# Altium PCB PCB2.PcbDoc
Units mm, origin at the board's own origin, x right, y up, seen from the top; angles counter-clockwise.
Board outline 80 x 80 mm, 4 copper layers (Top Layer, Internal Plane 1, Internal Plane 2, Bottom Layer); 5 components, 22 nets, 70 pads, 0 vias.
Unrouted connection lines stored in the file: 7.
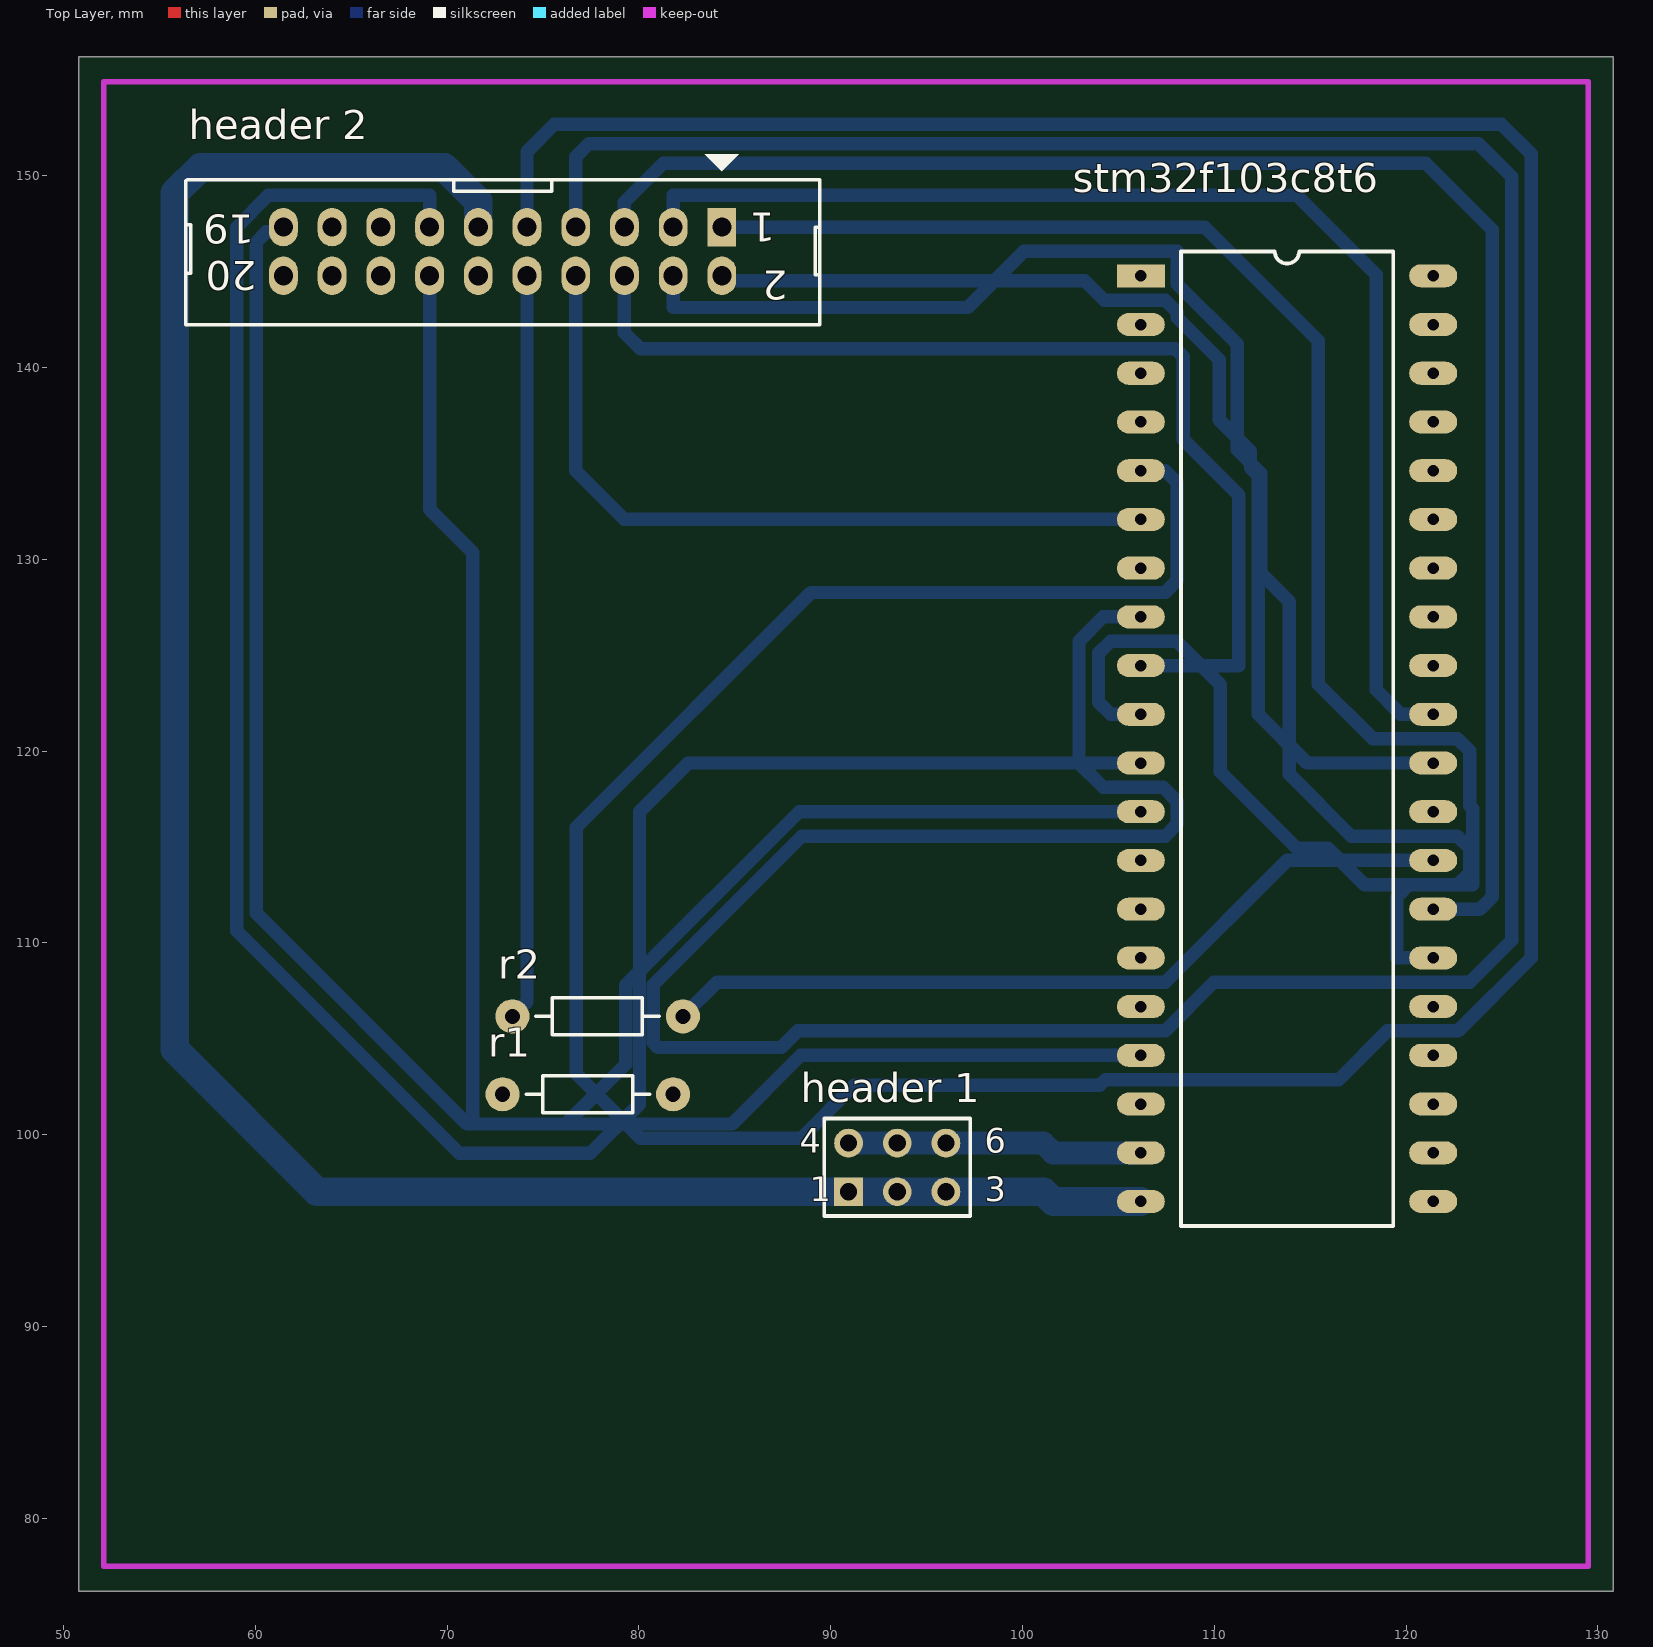
[diagram p0: Top Layer view]
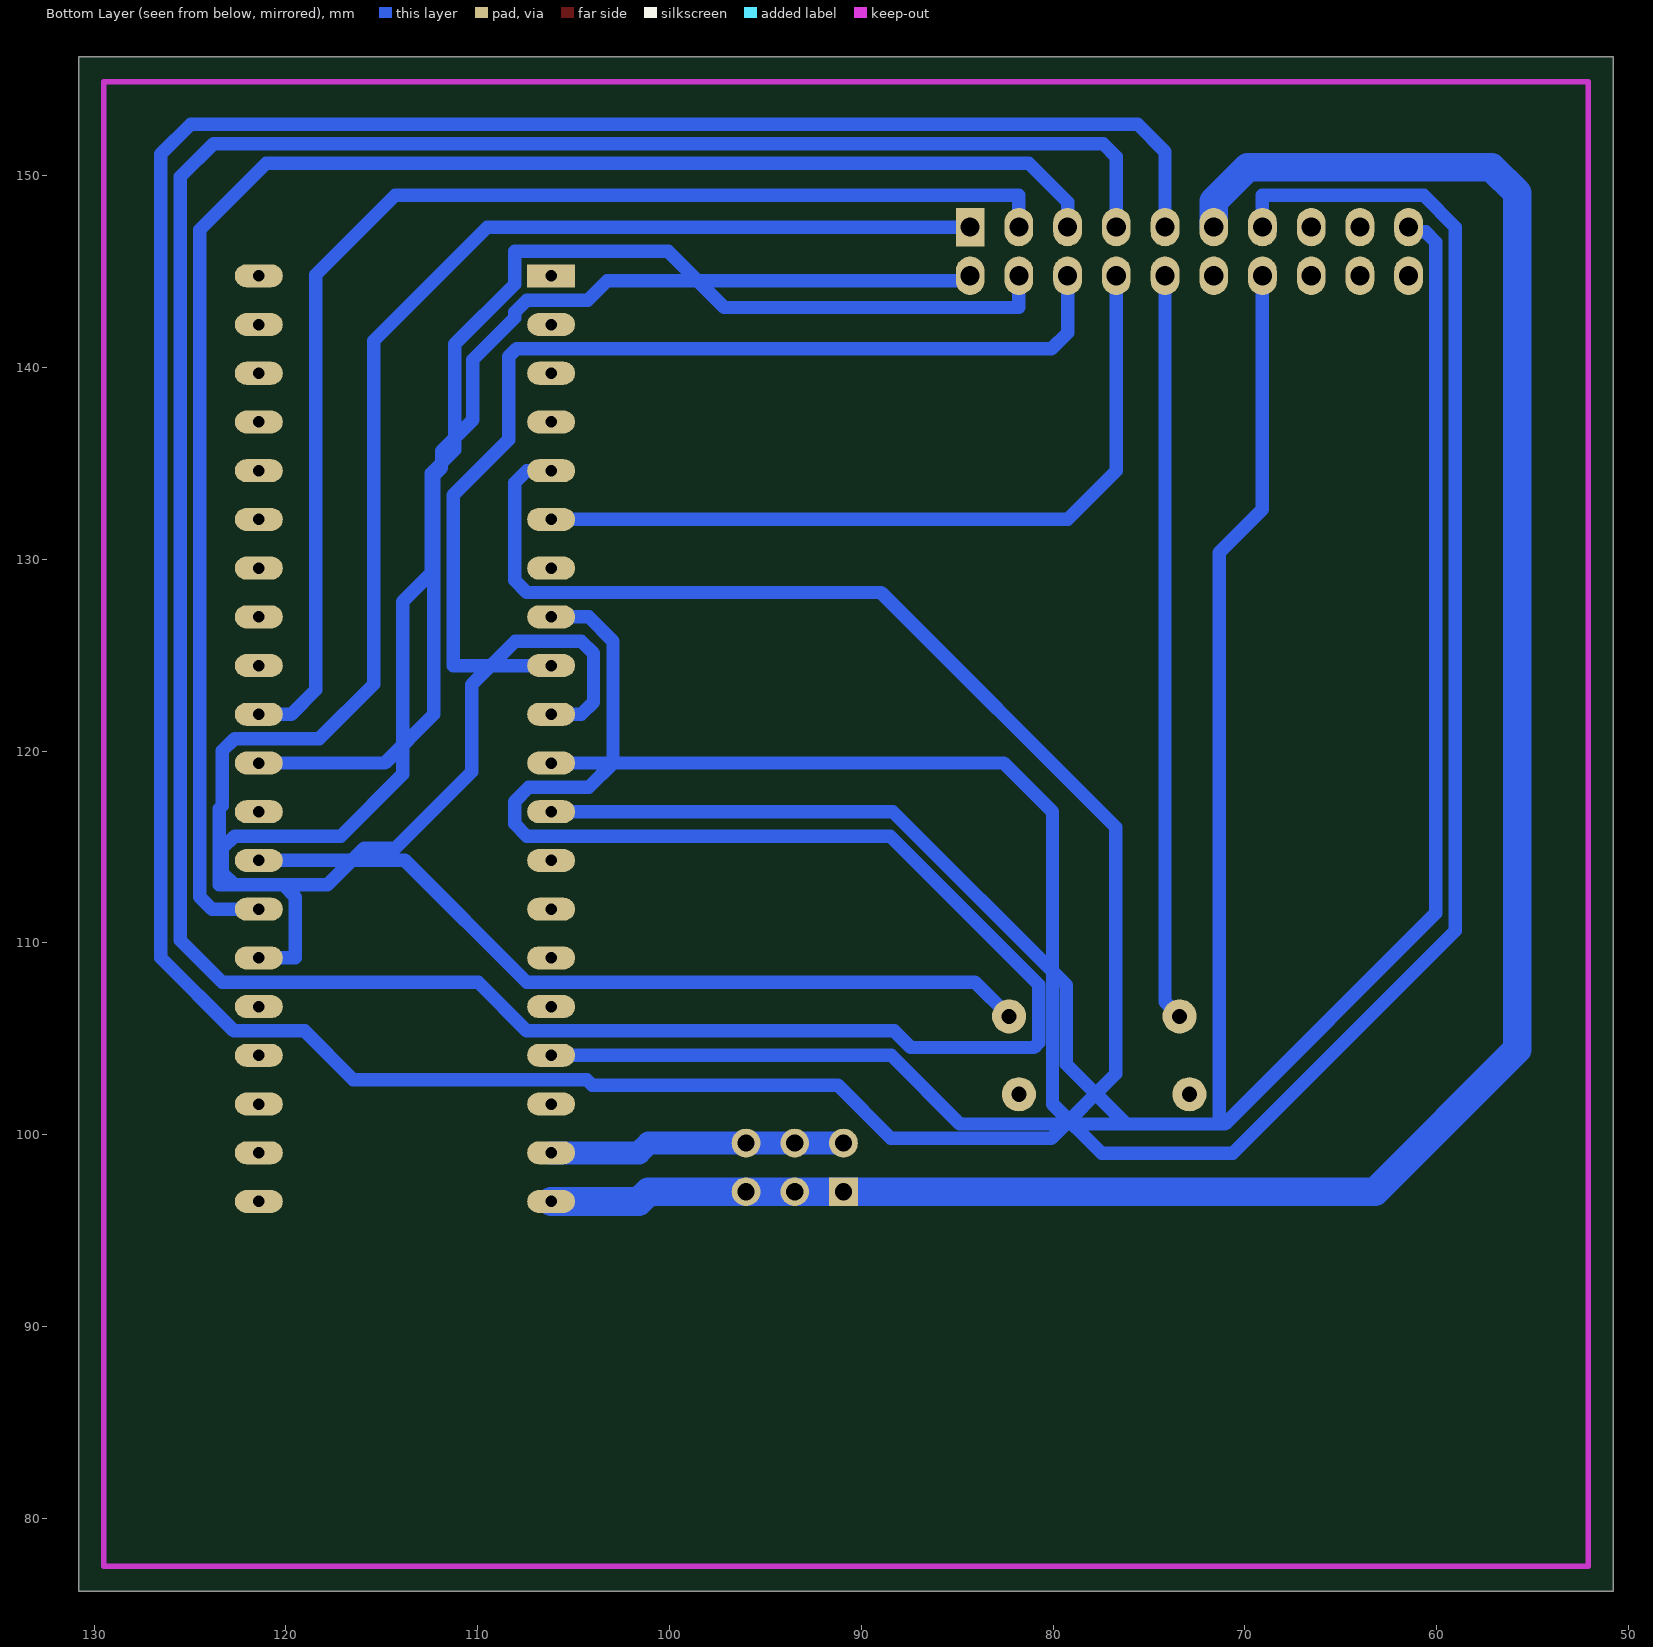
[diagram p1: Bottom Layer view, seen from below]
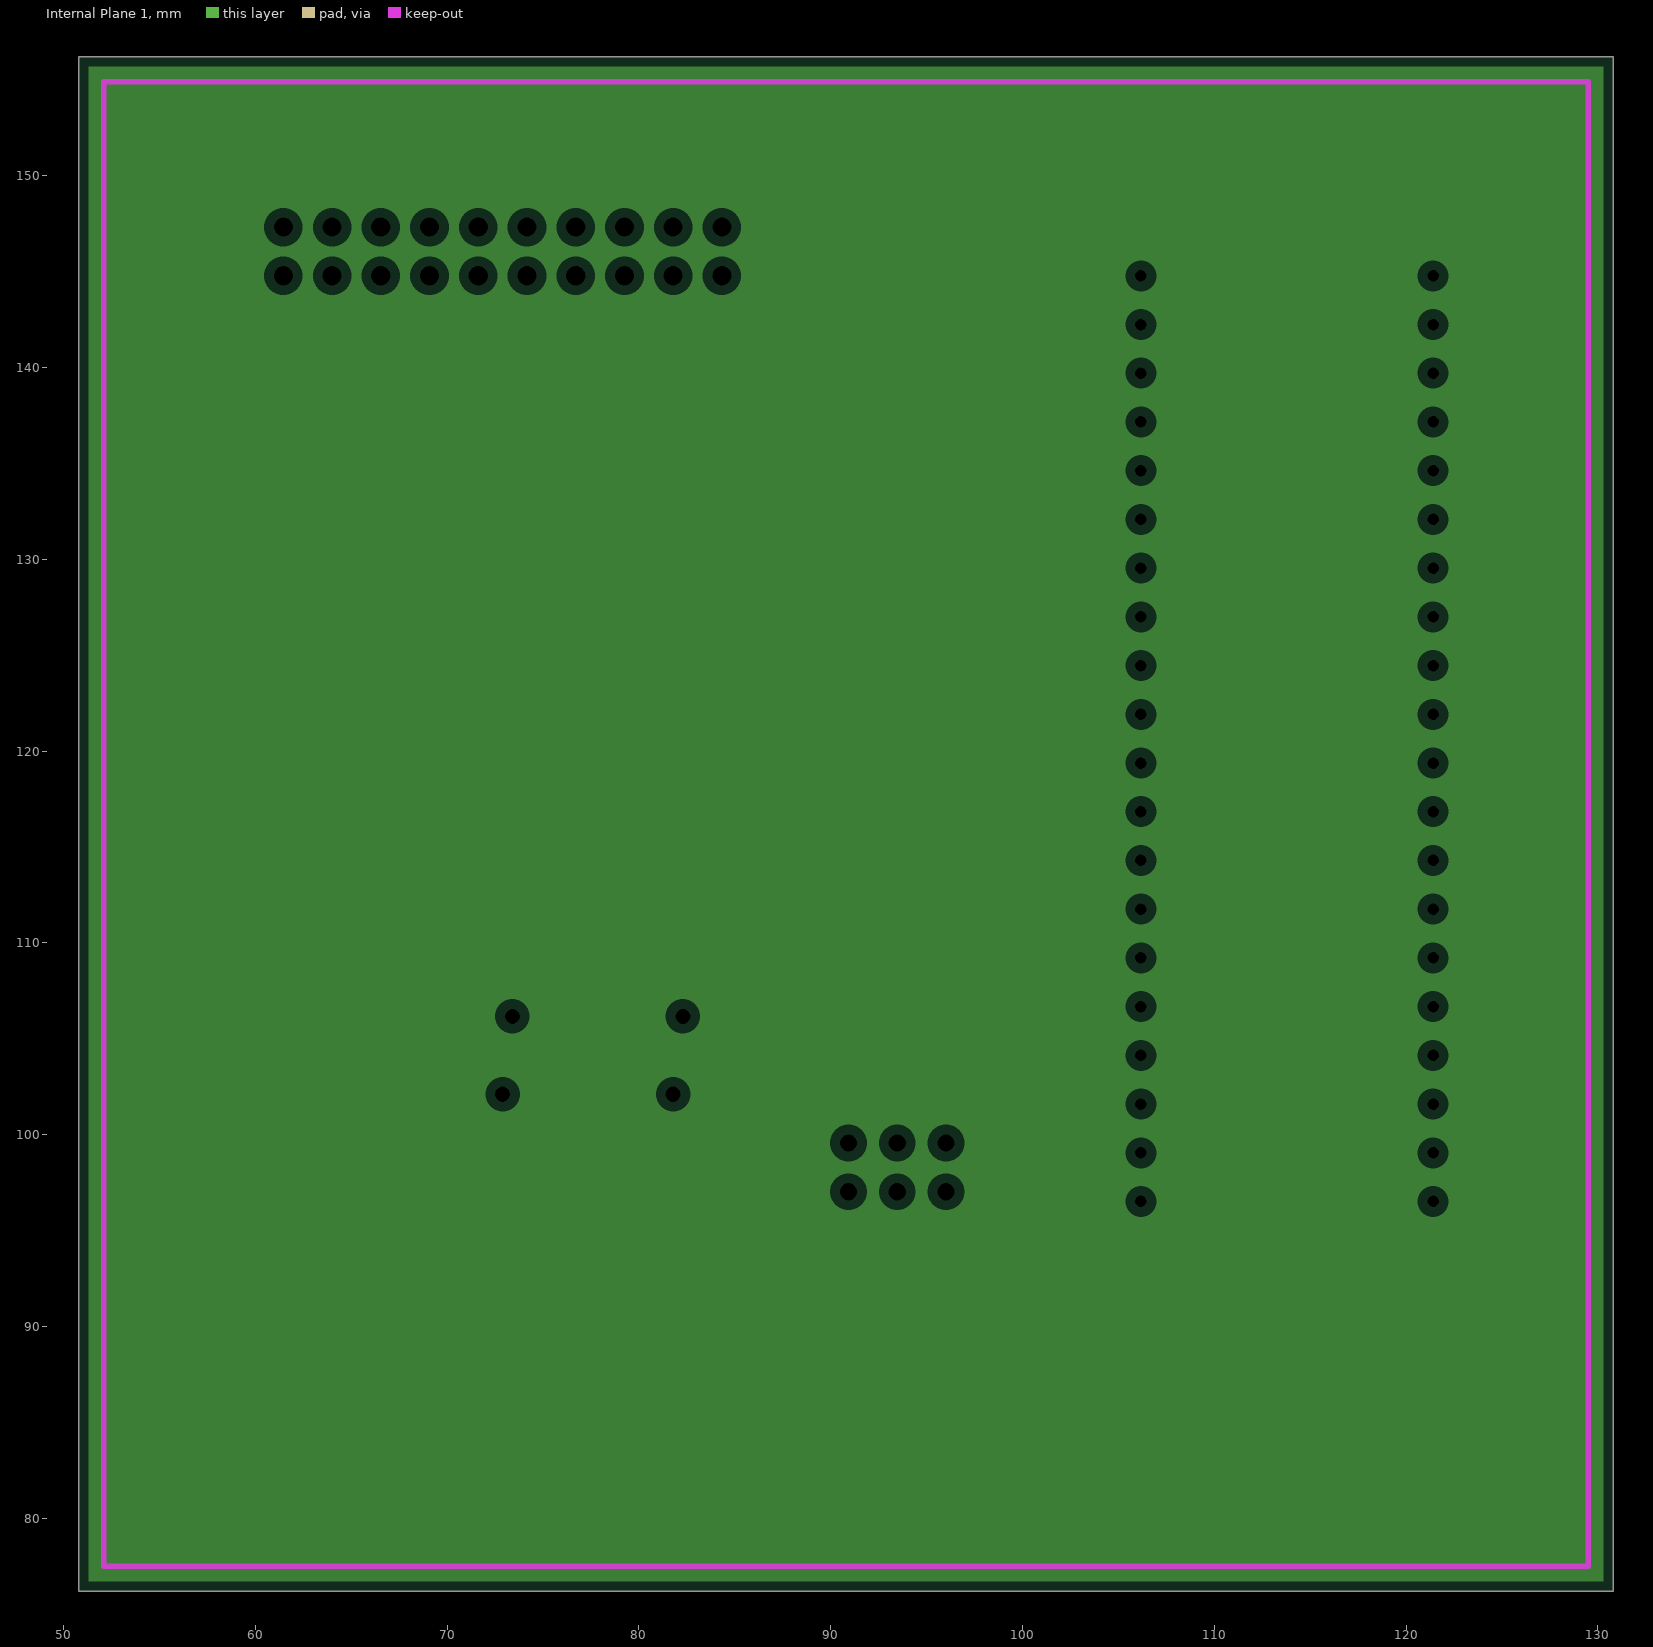
[diagram p2: Internal Plane 1, clearances drawn from the general rule]
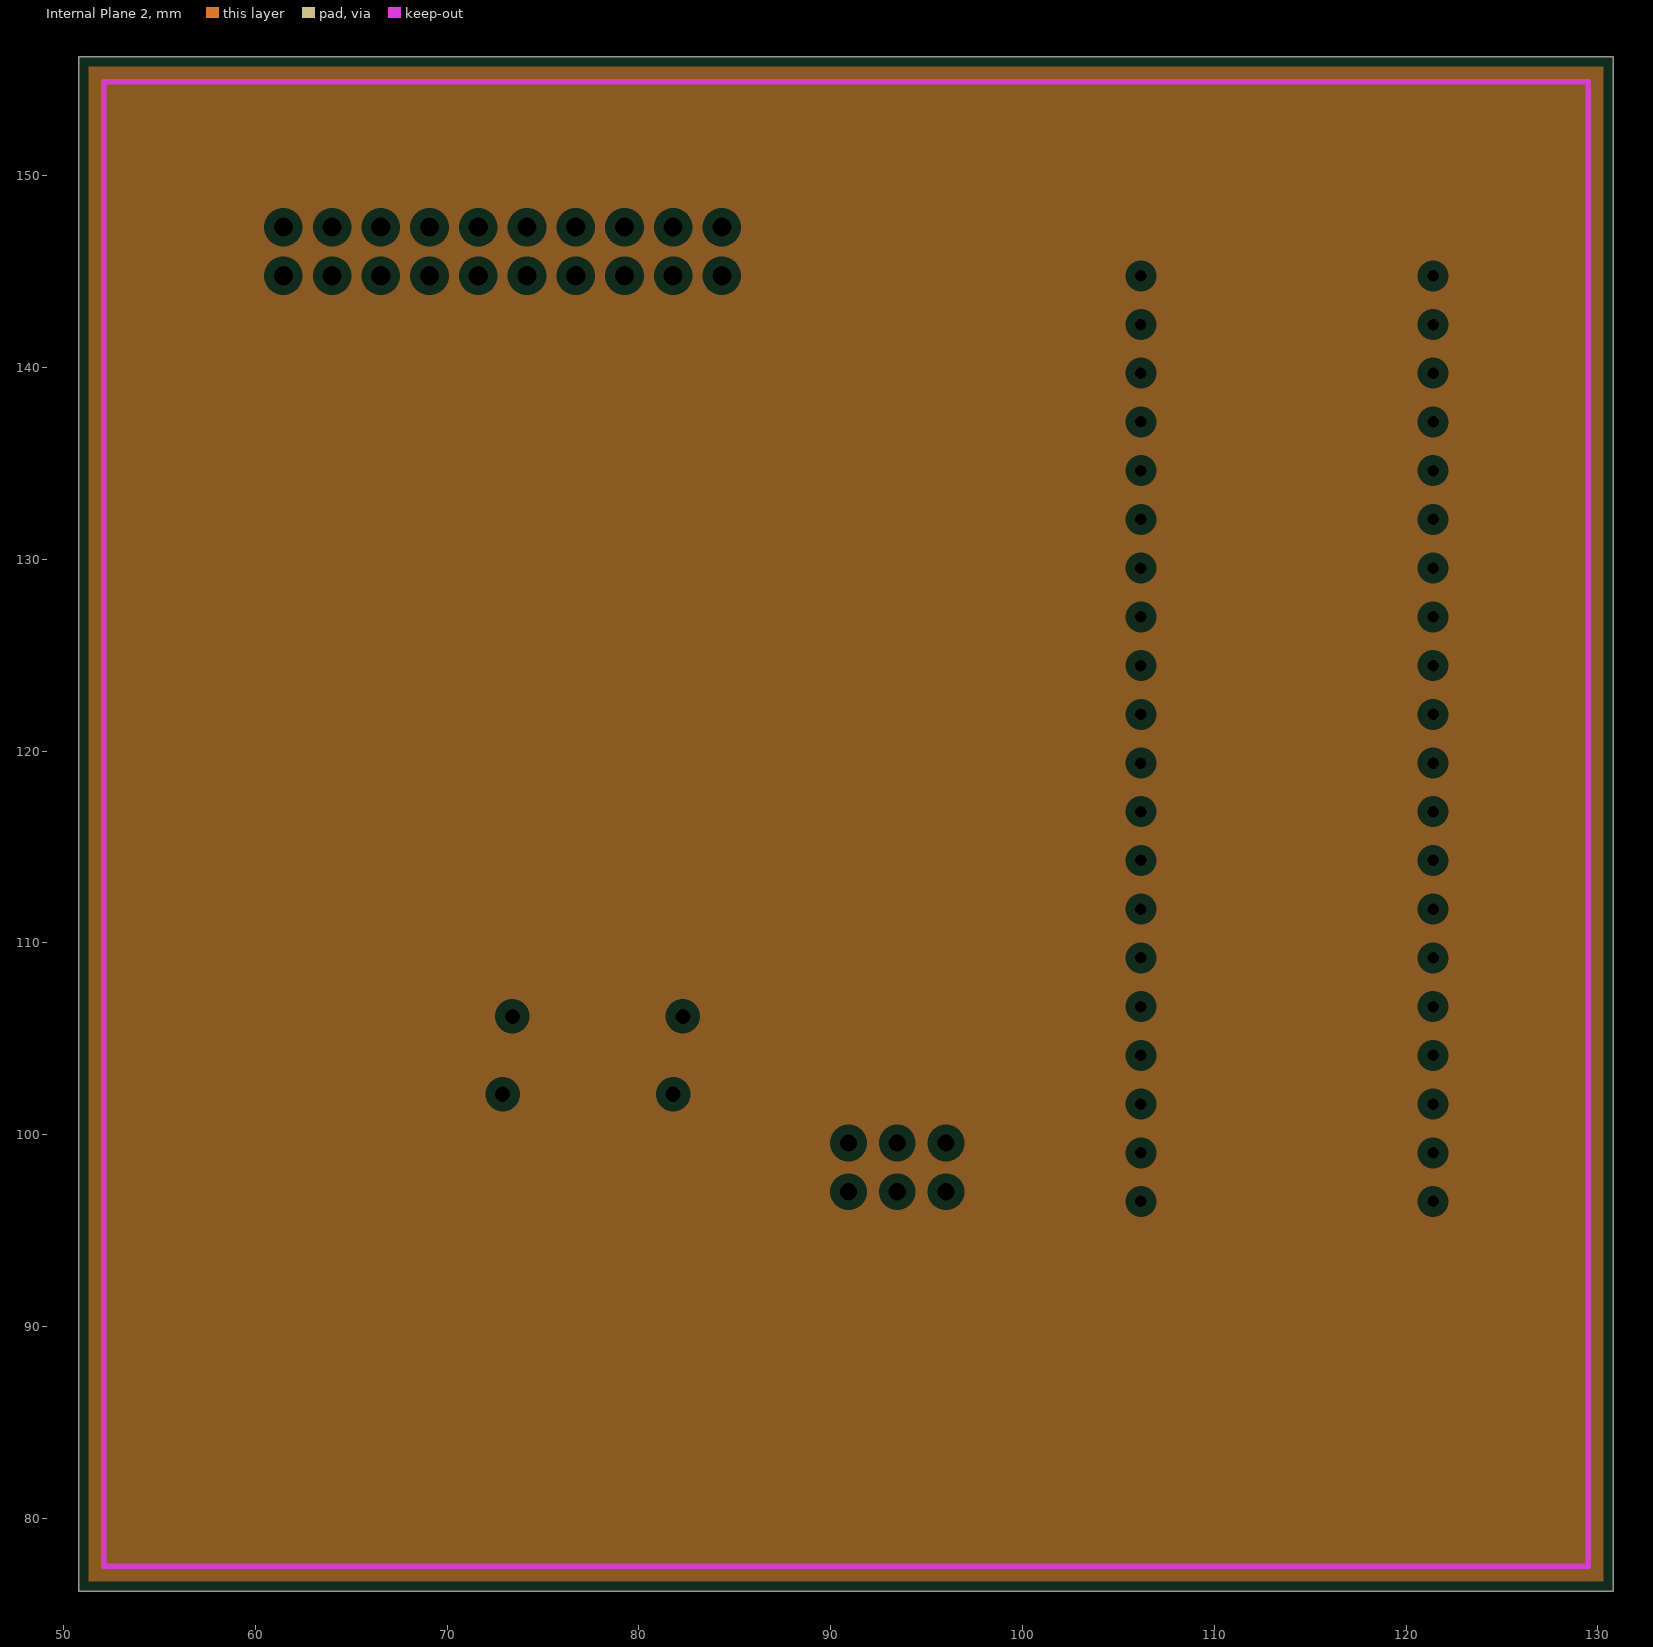
[diagram p3: Internal Plane 2, clearances drawn from the general rule]

## Layer stack, top to bottom
Top Layer: signal copper 0.0356
Dielectric: dielectric 0.32, FR-4, Dk 4.8
Internal Plane 1: plane copper 0.0356
Dielectric: dielectric 0.32, FR-4, Dk 4.8
Internal Plane 2: plane copper 0.0356
Dielectric: dielectric 0.32, FR-4, Dk 4.8
Bottom Layer: signal copper 0.0356

## Board outline
50.8,76.2 130.8,76.2 130.8,156.2 50.8,156.2

## Design rules (kind name [scope] priority, off if disabled: settings)
Clearance [All] p1: gap=0.3
PlaneClearance [All] p1: clearance=0.508
PlaneConnect [All] p1: planeconnectstyle=Relief reliefexpansion=0.508 reliefentries=4 reliefconductorwidth=0.254 reliefairgap=0.254
PolygonConnect [All] p1: connectstyle=Relief reliefconductorwidth=0.254 reliefentries=4 polygonreliefangle="90 Angle"
RoutingLayers [All] p1: top layer_v5=FALSE bottom layer_v5=TRUE
RoutingVias [All] p1: holewidth=0.6 width=1 viastyle="Through Hole" minholewidth=0.711 minwidth=1.27 maxholewidth=0.711 maxwidth=1.27
SilkscreenOverComponentPads [All] p1: minsilkscreentomaskgap=0.254
SolderMaskExpansion [All] p1: expansion=0.102
Width GND [InNet('GND')] p1: maxlimit=1.2 minlimit=1.2 preferedwidth=1.2
Width VCC [InNet('VCC')] p2: maxlimit=1.5 minlimit=1.5 preferedwidth=1.5
Width NET [All] p3: maxlimit=0.7 minlimit=0.7 preferedwidth=0.7
24 further rules are at their usual default settings.

## Components (designator, comment, footprint, x,y, rotation, side; value= is the part's Value field where it differs from the comment)
"header 1" "Header 3X2A" HDR2X3_CEN 90.932,97.028 r0 top
"header 2" "Header 10x2" Hed2X10 84.328,147.32 r180 top
r1 "1k" R1/4W 81.788,102.108 r180 top
r2 "1k" R1/4W 82.296,106.172 r180 top
stm32f103c8t6 "KIT STM32F103C8T6" "STM32F103 KIT" 106.172,144.78 r0 top

## Footprints (in the part's own frame and the unit in brackets; to place one, negate y for a bottom-side part, rotate by r counter-clockwise, add the part's x,y. Pads: shape width x height; smd on the part's side, far side on the other; paste and mask are expansions set on the pad)
HDR2X3_CEN [mm] "Connector; Header; 3x2 Position"
  rect 1.5x1.5 hole 0.9: 1(0,0)
  round 1.5 hole 0.9: 2(2.54,0) 3(5.08,0) 4(0,2.54) 5(2.54,2.54) 6(5.08,2.54)
  silkscreen extent -1.27,-1.27 6.35,3.81, body extent -1.27,-1.27 6.35,3.81, height 7
Hed2X10 [mm] "Header 10x2,20 pin, connecter"
  rect 1.5x2 hole 1: 1(0,0)
  oval 1.5x2 hole 1: 2(0,2.54) 3(2.54,0) 4(2.54,2.54) 5(5.08,0) 6(5.08,2.54) 7(7.62,0) 8(7.62,2.54) 9(10.16,0) 10(10.16,2.54) 11(12.7,0) 12(12.7,2.54) 13(15.24,0) 14(15.24,2.54) 15(17.78,0) 16(17.78,2.54) 17(20.32,0) 18(20.32,2.54) 19(22.86,0) 20(22.86,2.54)
  silkscreen extent -5.1,-3.81 27.94,5.1, body extent -5.17,-3.28 28.03,6.02, height 9.1
R1/4W [mil] "R 1/4W, 2 Pin, 350mil"
  round 70 hole 31: 1(0,0) 2(350,0)
  silkscreen extent 48,-38 302,38, body extent -40,-47 386,47, height 111
"STM32F103 KIT" [mm]
  rect 2.5x1.2 hole 0.6: 1(0,0)
  oval 2.5x1.2 hole 0.6: 2(0,-2.54) 3(0,-5.08) 4(0,-7.62) 5(0,-10.16) 6(0,-12.7) 7(0,-15.24) 8(0,-17.78) 9(0,-20.32) 10(0,-22.86) 11(0,-25.4) 12(0,-27.94) 13(0,-30.48) 14(0,-33.02) 15(0,-35.56) 16(0,-38.1) 17(0,-40.64) 18(0,-43.18) 19(0,-45.72) 20(0,-48.26) 21(15.24,-48.26) 22(15.24,-45.72) 23(15.24,-43.18) 24(15.24,-40.64) 25(15.24,-38.1) 26(15.24,-35.56) 27(15.24,-33.02) 28(15.24,-30.48) 29(15.24,-27.94) 30(15.24,-25.4) 31(15.24,-22.86) 32(15.24,-20.32) 33(15.24,-17.78) 34(15.24,-15.24) 35(15.24,-12.7) 36(15.24,-10.16) 37(15.24,-7.62) 38(15.24,-5.08) 39(15.24,-2.54) 40(15.24,0)
  silkscreen extent 2.08,-49.53 13.16,1.27, body extent -3.81,-53.97 19.05,3.59, height 16.12

## Part data
"header 1": "Header, 3-Pin, Dual row"
"header 2": library part HED10X2
r1 r2: library part R1/4W, "Resistor 1/4W"
stm32f103c8t6: library part "STM32f103 Bluepill", "KIT STM32F103C8T6 Bluepill"

## Nets (pads, with @x,y where several pads share a name; then routed paths per layer and width w, separated by ;. In a path a pad name is that pad's centre, name@x,y a point inside that pad or via, vN(x,y) a via of type N, cw(c..) or ccw(c..) an arc to the next point about the centre after c; other vN are vias at no path point)
AS: "header 2.4" stm32f103c8t6.26 | length 80.5
  Bottom Layer w0.7: 81.788,144.78 81.788,143.129 97.155,143.129 100.076,146.05 108.077,146.05 108.077,144.348 111.201,141.224 111.201,135.712 112.42,134.493 112.42,129.286 113.919,127.787 113.919,118.796 117.145,115.57 122.677,115.57 123.312,114.935 123.312,113.665 122.677,113.03 120.142,113.03 119.507,112.395 119.507,109.22 stm32f103c8t6.26
D4: "header 2.16" stm32f103c8t6.14
D5: "header 2.17" stm32f103c8t6.15
D6: "header 2.18" stm32f103c8t6.16
D7: "header 2.19" stm32f103c8t6.17 | length 89
  Bottom Layer w0.7: 61.468,147.32 61.468,147.066 60.579,147.066 60.046,146.533 60.046,111.557 71.044,100.559 84.861,100.559 88.443,104.14 stm32f103c8t6.17
DM: "header 2.20" r1.2
E: "header 2.15" stm32f103c8t6.13
EN: "header 2.1" stm32f103c8t6.10 | length 100.5
  Bottom Layer w0.7: 84.328,147.32 109.499,147.32 115.427,141.392 115.427,123.495 118.272,120.65 122.677,120.65 123.312,120.015 123.312,117.145 123.469,116.987 123.469,113.03 117.831,113.03 115.926,114.935 114.3,114.935 110.312,118.923 110.312,123.469 108.052,125.73 104.597,125.73 103.962,125.095 103.962,122.555 104.597,121.92 stm32f103c8t6.10
GND: "header 1.4" "header 1.5" "header 1.6" "header 2.12" stm32f103c8t6.19 | length 15.5
  Bottom Layer w1.2: 90.932,99.568 93.472,99.568 96.012,99.568 101.092,99.568 101.6,99.06 stm32f103c8t6.19
IN1: "header 2.2" stm32f103c8t6.30 | length 57.6
  Bottom Layer w0.7: 84.328,144.78 84.328,144.526 103.251,144.526 104.267,143.51 107.442,143.51 108.077,142.875 108.077,142.596 110.261,140.411 110.261,137.262 111.887,135.636 111.887,134.772 112.293,134.366 112.293,121.92 114.833,119.38 stm32f103c8t6.30
IN2: "header 2.3" stm32f103c8t6.31 | length 65.2
  Bottom Layer w0.7: 81.788,147.32 81.788,148.971 114.3,148.971 118.44,144.831 118.44,123.19 119.71,121.92 stm32f103c8t6.31
LED1: "header 2.8" stm32f103c8t6.6 | length 40.7
  Bottom Layer w0.7: 76.708,144.78 76.708,134.62 79.248,132.08 stm32f103c8t6.6
LED2: "header 2.9" stm32f103c8t6.5 | length 211.3
  Bottom Layer w0.7: 74.168,147.32 74.168,151.257 75.59,152.679 124.968,152.679 126.517,151.13 126.517,109.22 122.707,105.41 119.024,105.41 116.484,102.87 104.318,102.87 104.038,102.591 91.237,102.591 88.468,99.822 80.086,99.822 76.733,103.175 76.733,116.027 88.976,128.27 107.442,128.27 108.077,128.905 108.077,133.985 107.442,134.62 stm32f103c8t6.5
MUA: "header 2.5" stm32f103c8t6.27 | length 86.9
  Bottom Layer w0.7: 79.248,147.32 79.248,148.615 81.28,150.647 121.023,150.647 124.485,147.185 124.485,112.395 123.85,111.76 stm32f103c8t6.27
Netr1_1: r1.1 stm32f103c8t6.29
Netr2_1: r2.1 stm32f103c8t6.28 | length 42.5
  Bottom Layer w0.7: r2.1 84.074,107.95 107.442,107.95 113.792,114.3 stm32f103c8t6.28
RS: "header 2.13" stm32f103c8t6.11 | length 118.4
  Bottom Layer w0.7: 69.088,147.32 69.088,148.971 60.681,148.971 59.03,147.32 59.03,110.642 70.637,99.035 77.47,99.035 80.035,101.6 80.035,116.84 82.575,119.38 stm32f103c8t6.11
RW: "header 2.14" stm32f103c8t6.12 | length 89.1
  Bottom Layer w0.7: 69.088,144.78 69.088,132.613 71.349,130.353 71.349,100.559 76.2,100.559 79.324,103.683 79.324,107.806 88.358,116.84 stm32f103c8t6.12
TD/TC: "header 2.10" r2.2 | length 38.9
  Bottom Layer w0.7: r2.2 74.168,106.934 74.168,144.78
TOI1: "header 2.6" stm32f103c8t6.9 | length 55
  Bottom Layer w0.7: 79.248,144.78 79.248,141.808 80.086,140.97 107.975,140.97 108.393,140.553 108.393,136.238 111.277,133.353 111.277,124.46 stm32f103c8t6.9
TOI2: "header 2.7" stm32f103c8t6.8 | length 191.5
  Bottom Layer w0.7: 76.708,147.32 76.708,150.978 77.394,151.663 123.774,151.663 125.501,149.936 125.501,110.134 123.317,107.95 109.982,107.95 107.442,105.41 88.29,105.41 87.427,104.546 81.001,104.546 80.747,104.8 80.747,107.815 88.502,115.57 107.442,115.57 108.077,116.205 108.077,117.373 107.34,118.11 104.216,118.11 102.946,119.38 102.946,125.73 104.216,127 stm32f103c8t6.8
VCC: "header 1.1" "header 1.2" "header 1.3" "header 2.11" stm32f103c8t6.20 | length 116.8
  Bottom Layer w1.5: 71.628,147.32 71.628,148.666 69.85,150.444 57.15,150.444 55.804,149.098 55.804,104.445 63.221,97.028 90.932,97.028 93.472,97.028 96.012,97.028 101.092,97.028 101.6,96.52 stm32f103c8t6.20
pads on no net: stm32f103c8t6.1 stm32f103c8t6.2 stm32f103c8t6.3 stm32f103c8t6.4 stm32f103c8t6.7 stm32f103c8t6.18 stm32f103c8t6.21 stm32f103c8t6.22 stm32f103c8t6.23 stm32f103c8t6.24 stm32f103c8t6.25 stm32f103c8t6.32 stm32f103c8t6.33 stm32f103c8t6.34 stm32f103c8t6.35 stm32f103c8t6.36 stm32f103c8t6.37 stm32f103c8t6.38 stm32f103c8t6.39 stm32f103c8t6.40

## Polygon pours and split planes (outlines as drawn)
no net on Internal Plane 1 (split plane): 130.8,76.2 50.8,76.2 50.8,156.2 130.8,156.2
no net on Internal Plane 2 (split plane): 130.8,76.2 50.8,76.2 50.8,156.2 130.8,156.2

## Keep-outs
Keep-Out Layer:
  lines w0.3: 52.1,77.5 129.5,77.5 129.5,154.9 52.1,154.9 52.1,77.5

## Silkscreen, mask and mechanical layers (free items; w line width, h text height)
Drill Drawing:
  text ".LEGEND" at 135.88,81.28 h1.52
  text "Drill Drawing." at 135.88,78.74 h1.52

## Dimensions
52.1,77.5 to 129.5,77.5 on Mechanical 1
52.1,77.5 to 52.1,154.9 on Mechanical 1

## Text inside footprints (layer, text, board x,y; h text height)
"header 1": Top Overlay "6" at 98.044,99.06 h1.27; Top Overlay "3" at 98.044,96.52 h1.27; Top Overlay "1" at 88.9,96.52 h1.27; Top Overlay "4" at 88.392,99.06 h1.27
"header 2": Top Overlay "1" at 87.103,148.07 h1.52 r180; Top Overlay "2" at 87.757,145.034 h1.52 r180; Top Overlay "19" at 59.944,147.955 h1.52 r180; Top Overlay "20" at 60.071,145.542 h1.52 r180